# EAGLE board Cansat-2025-1 (EAGLE 9.4.2)
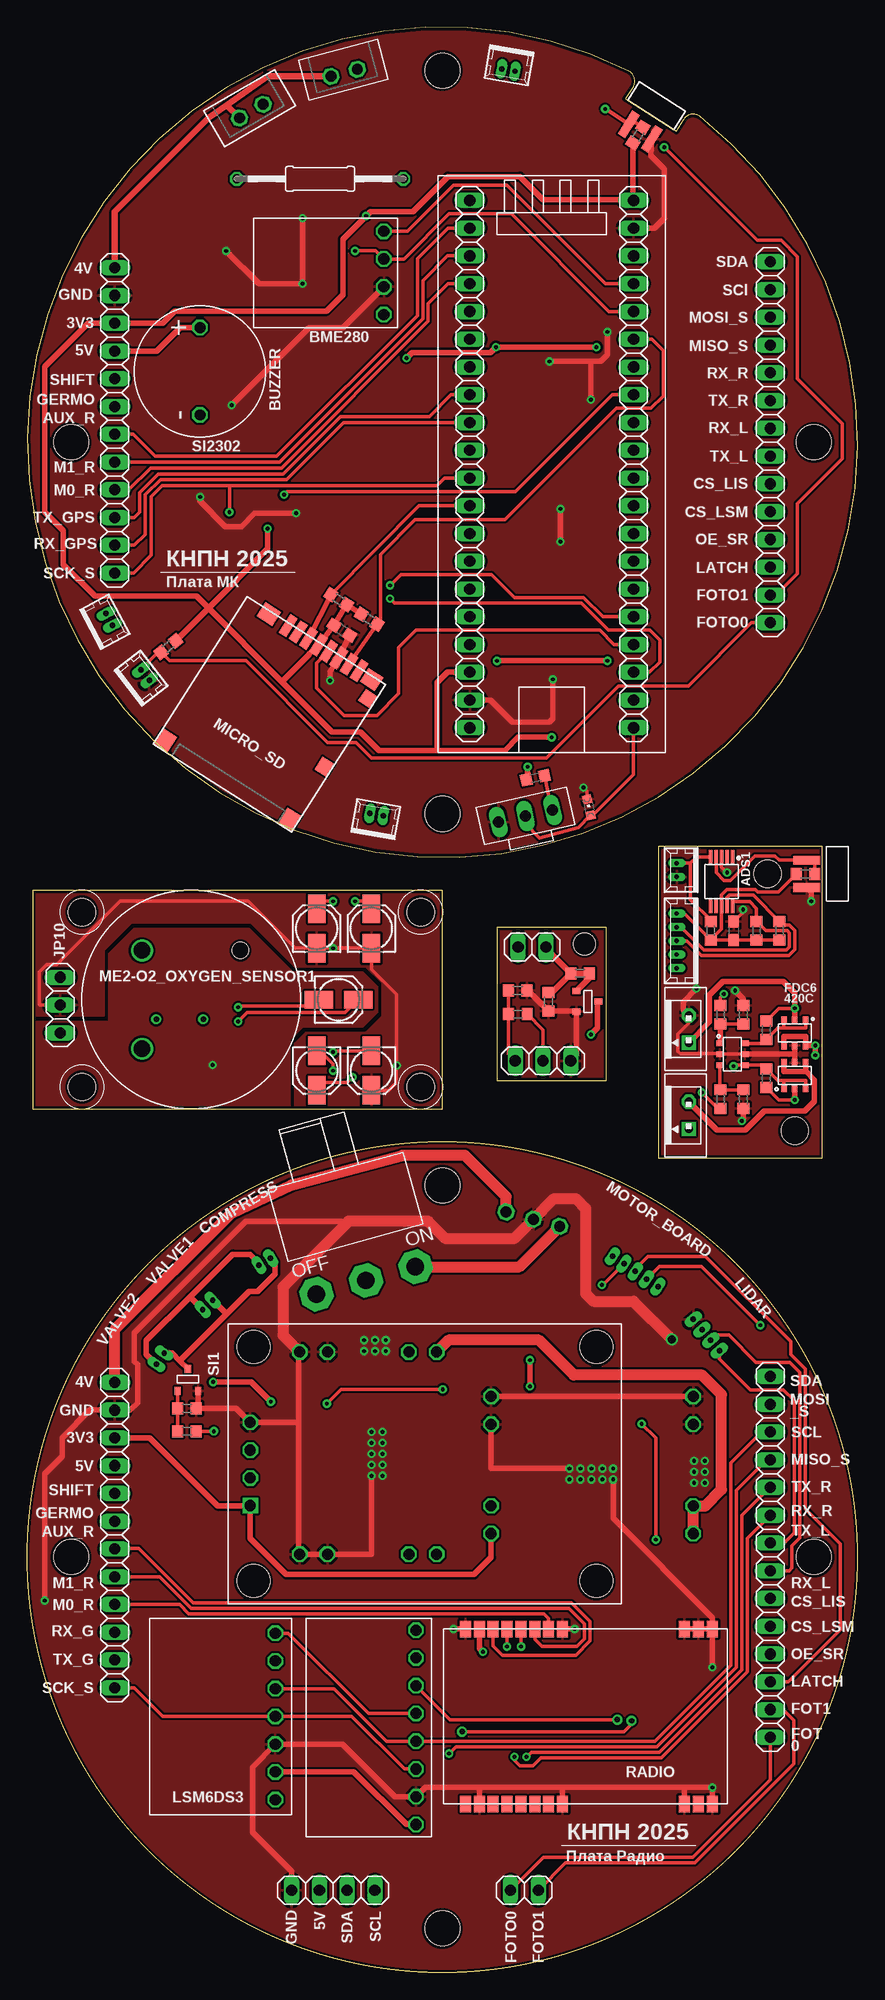
[diagram p0: board, top side]
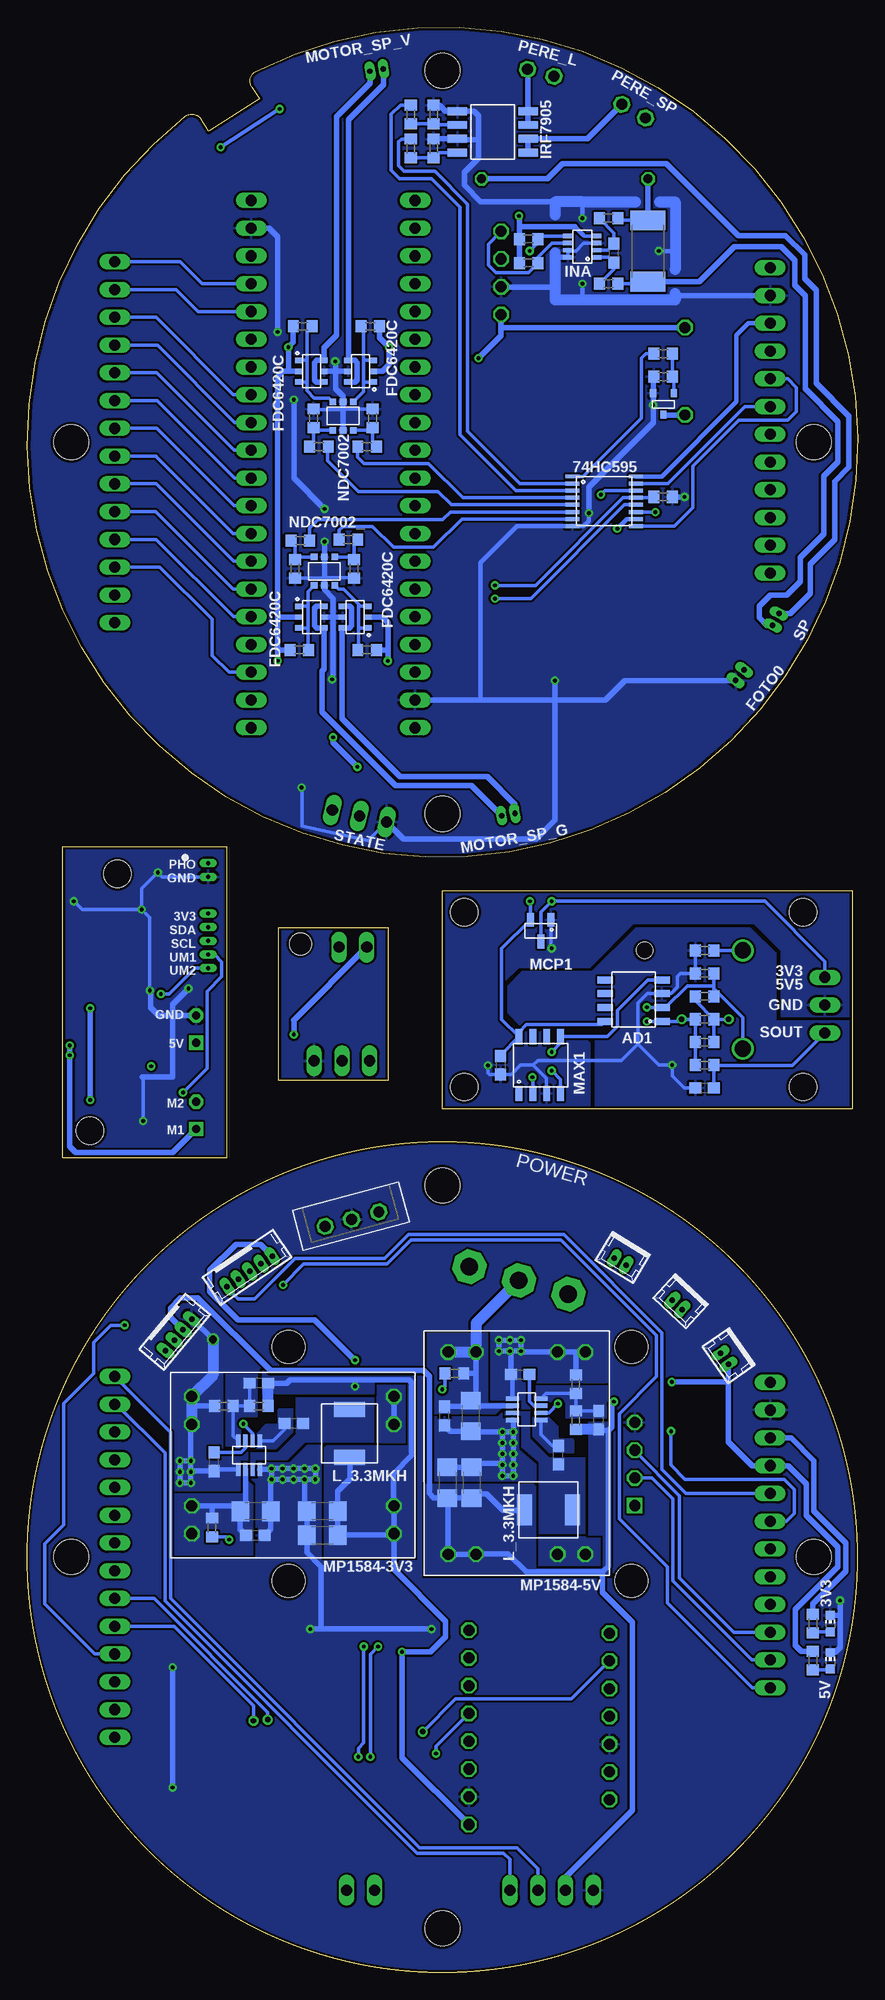
[diagram p1: board, bottom side, seen from below]

Size 76 x 177.97 mm. Coordinates in mm from the lower left corner, seen from the top.
Outline: 43,81.6 53,81.6 53,95.6 43,95.6 43,81.6
Outline: 57.75,74.5 72.75,74.5 72.75,103 57.75,103 57.75,74.5
Outline: 55.46,172.52 54.76,171.42 59.39,168.46 60.1,169.57 arc-96 61.56,169.81 arc-348 55.06,173.95 arc-96 55.46,172.52
Outline: 0.5,79 38,79 38,99 0.5,99 0.5,79
Outline: circle at 38,38 radius 38
Copper layers (1*16): Top 0.035mm / dielectric 1mm / Bottom 0.035mm
Design rules "default *": minimum track width 0.2mm, minimum drill 0.35mm, track to track 0.2mm, track to pad 0.2mm, pad to pad 0.2mm, via to via 0.2mm, smd to smd 6mil, copper to edge 10mil, drill to drill 6mil, minimum pad ring 0.2mm, minimum via ring 0.2mm, stop-mask expansion 4mil, vias tented up to drill 0mil, thermal gap 10mil
Holes 3.2 mm at 38,72 72,38 38,4 4,38 4,140 38,106 72,140 38,174
Holes 2 mm at 51,94.1
Holes 2.5 mm at 67.75,100.5 70.25,77 5,97 5,81 36,97 36,81

## Footprints (pad centres in the part's own frame; a part is rotated, then mirrored left to right if it is on the bottom)
CHIP-LED0603 = smd 0.8 x 0.8: A 0,-0.75; C 0,0.75
TSSOP16 = smd 1.26 x 0.36: 1 -2.9,2.275; 2 -2.9,1.625; 3 -2.9,0.975; 4 -2.9,0.325; 5 -2.9,-0.325; 6 -2.9,-0.975; 7 -2.9,-1.625; 8 -2.9,-2.275; 9 2.9,-2.275; 10 2.9,-1.625; 11 2.9,-0.975; 12 2.9,-0.325; 13 2.9,0.325; 14 2.9,0.975; 15 2.9,1.625; 16 2.9,2.275
AD8572 = smd 1.4 x 0.635: P1 -2.6,2; P2 -2.6,0.73; P3 -2.6,-0.54; P4 -2.6,-1.81; P5 2.6,-1.81; P6 2.6,-0.54; P7 2.6,0.73; P8 2.6,2
MSOP10 = smd 0.3 x 1.275: 1 -1,-2.24; 2 -0.5,-2.24; 3 0,-2.24; 4 0.5,-2.24; 5 1,-2.24; 6 1,2.24; 7 0.5,2.24; 8 0,2.24; 9 -0.5,2.24; 10 -1,2.24
BME280-PINS-ONLY = drill 1.016 octagon: P$1 -3.81,5.33; P$2 -1.27,5.33; P$3 1.27,5.33; P$4 3.81,5.33
BUZZER-S8R12 = drill 1 octagon: P$1 -4,0; P$2 4,0
C0603 = smd 1.1 x 1: 1 -0.85,0; 2 0.85,0
C1206 = smd 1.6 x 1.8: 1 -1.4,0; 2 1.4,0
153CLV-0405 = smd 2.6 x 1.6: + 1.8,0; - -1.8,0
53047-02 = drill 0.5 pad 0.698 long: 1 0.625,0.45; 2 -0.625,0.45
GPS-NEO7M = drill 1.016 square: P$1 -3.81,16 | drill 1.016 octagon: P$2 -1.27,16; P$3 1.27,16; P$4 3.81,16 | hole 3: -10.7,15.7; 10.7,15.7; 10.7,-15.7; -10.7,-15.7
SOT23-8 = smd 0.9 x 0.4: 1 -1.3,0.975; 2 -1.3,0.325; 3 -1.3,-0.325; 4 -1.3,-0.975; 5 1.3,-0.975; 6 1.3,-0.325; 7 1.3,0.325; 8 1.3,0.975
SO8 = smd 0.72 x 1.78: 1 -1.905,-3.23; 2 -0.635,-3.23; 3 0.635,-3.23; 4 1.905,-3.23; 5 1.905,3.23; 6 0.635,3.23; 7 -0.635,3.23; 8 -1.905,3.23
1X14 = drill 1.016 long: 1 -16.51,0; 2 -13.97,0; 3 -11.43,0; 4 -8.89,0; 5 -6.35,0; 6 -3.81,0; 7 -1.27,0; 8 1.27,0; 9 3.81,0; 10 6.35,0; 11 8.89,0; 12 11.43,0; 13 13.97,0; 14 16.51,0
1X02 = drill 1.016 long: 1 -1.27,0; 2 1.27,0
1X12 = drill 1.016 long: 1 -13.97,0; 2 -11.43,0; 3 -8.89,0; 4 -6.35,0; 5 -3.81,0; 6 -1.27,0; 7 1.27,0; 8 3.81,0; 9 6.35,0; 10 8.89,0; 11 11.43,0; 12 13.97,0
1X04 = drill 1.016 long: 1 -3.81,0; 2 -1.27,0; 3 1.27,0; 4 3.81,0
1X03 = drill 1.016 long: 1 -2.54,0; 2 0,0; 3 2.54,0
L_SPM5020 = smd 1.4 x 2.8: P$1 -2.2,0; P$2 2.2,0
53047-04 = drill 0.5 pad 0.698 long: 1 1.875,0.45; 2 0.625,0.45; 3 -0.625,0.45; 4 -1.875,0.45
LSM6DS3_WITHOUT = drill 1.016 octagon: P$1 -7.62,-5; P$2 -5.08,-5; P$3 -2.54,-5; P$4 0,-5; P$5 2.54,-5; P$6 5.08,-5; P$7 7.62,-5
MAX660 = smd 1.4 x 0.635: P1 -2.6,2; P2 -2.6,0.73; P3 -2.6,-0.54; P4 -2.6,-1.81; P5 2.6,-1.81; P6 2.6,-0.54; P7 2.6,0.73; P8 2.6,2
MCP1700 = smd 0.635 x 1.27: P1 -0.95,-1; P2 0.95,-1; P3 0,1
ME2-O2_OXYGEN_SENSOR = drill 1.5 pad 2: C -6.364,0; D 0,6.364 | hole 1.5: 6.364,0
SD = smd 0.8 x 2: CLK 6,-15.77; CMD 8.2,-15.77; DAT0 3.8,-15.77; DAT1 2.7,-15.77; DAT2 10.4,-15.77; DAT3 9.3,-15.77; VDD 7.1,-15.77; VSS 4.9,-15.77 | smd 1.5 x 1.7: P$9 0.75,-0.85; P$13 14.25,-0.85 | smd 1.6 x 1.5: P$10 1.3,-15.7 | smd 1.29 x 1.3: P$11 0.645,-14.05 | smd 1.29 x 1.4: P$12 0.645,-6.65 | smd 1.7 x 1.5: P$14 12.45,-15.7
53047-05 = drill 0.5 pad 0.698 long: 1 2.5,0.45; 2 1.25,0.45; 3 0,0.45; 4 -1.25,0.45; 5 -2.5,0.45
MP1584-B = drill 1.016 octagon: P$1 -9.25,-6.27; P$2 -9.25,-3.73; P$3 -9.25,3.73; P$4 -9.25,6.27; P$5 9.25,6.27; P$6 9.25,3.73; P$7 9.25,-3.73; P$8 9.25,-6.27
SOT23-6 = smd 0.6 x 0.6: 1 -0.95,-1.3; 2 0,-1.3; 3 0.95,-1.3; 4 0.95,1.3; 5 0,1.3; 6 -0.95,1.3
JST-2-2.5 = drill 1 pad 1.5 octagon: 1 1.25,0; 2 -1.25,0
SS_12D11 = drill 1.6 pad 3 octagon: 1 -4.7,0; 2 0,0; 3 4.7,0
R0603 = smd 1 x 1.1: 1 -0.85,0; 2 0.85,0
R2512 = smd 1.8 x 3.2: 1 -2.8,0; 2 2.8,0
0207/15 = drill 0.813 octagon: 1 -7.62,0; 2 7.62,0
E220-400T22S = smd 1.5 x 1: P$1 -8,11; P$2 -8,9.73; P$3 -8,8.46; P$4 -8,7.19; P$5 -8,5.92; P$6 -8,4.65; P$7 -8,3.38; P$8 -8,2.11; P$11 -8,-9.06; P$12 -8,-10.33; P$13 -8,-11.6; P$14 8,-11.6; P$15 8,-10.33; P$16 8,-9.06; P$19 8,2.11; P$20 8,3.38; P$21 8,4.65; P$22 8,5.92; P$23 8,7.19; P$24 8,8.46; P$25 8,9.73; P$26 8,11
SOT23-3 = smd 0.56 x 0.73: 1 -0.95,-1; 2 0.95,-1; 3 0,1
CHIPLED_0603 = smd 0.8 x 0.8: A 0,-0.75; C 0,0.75
STM32F411_BOARD = drill 1.016 long: 1 24.13,7.5; 2 21.59,7.5; 3 19.05,7.5; 4 16.51,7.5; 5 13.97,7.5; 6 11.43,7.5; 7 8.89,7.5; 8 6.35,7.5; 9 3.81,7.5; 10 1.27,7.5; 11 -1.27,7.5; 12 -3.81,7.5; 13 -6.35,7.5; 14 -8.89,7.5; 15 -11.43,7.5; 16 -13.97,7.5; 17 -16.51,7.5; 18 -19.05,7.5; 19 -21.59,7.5; 20 -24.13,7.5; 21 -24.13,-7.5; 22 -21.59,-7.5; 23 -19.05,-7.5; 24 -16.51,-7.5; 25 -13.97,-7.5; 26 -11.43,-7.5; 27 -8.89,-7.5; 28 -6.35,-7.5; 29 -3.81,-7.5; 30 -1.27,-7.5; 31 1.27,-7.5; 32 3.81,-7.5; 33 6.35,-7.5; 34 8.89,-7.5; 35 11.43,-7.5; 36 13.97,-7.5; 37 16.51,-7.5; 38 19.05,-7.5; 39 21.59,-7.5; 40 24.13,-7.5
VT93N1 = smd 0.8 x 2.5: P$1 -1.25,-1.8; P$2 1.25,-1.8
SWITCH_MSS = drill 1.016 long: 1 -2.54,0; 2 0,0; 3 2.54,0
TSOT23-8 = smd 0.4 x 1.2: P$1 -0.975,-1.3; P$2 -0.325,-1.3; P$3 0.325,-1.3; P$4 0.975,-1.3; P$5 0.975,1.3; P$6 0.325,1.3; P$7 -0.325,1.3; P$8 -0.975,1.3
LIS3MDL = drill 1.016 octagon: CS -5.08,-3.81; DRDY -5.08,-8.89; GND -5.08,6.35; INT -5.08,-6.35; SCL -5.08,3.81; SDA -5.08,1.27; SDO -5.08,-1.27; UCC -5.08,8.89
TSOP-6 = smd 0.5 x 0.7: P$1 -1,-1.15; P$2 0,-1.15; P$3 1,-1.15; P$4 1,1.15; P$5 0,1.15; P$6 -1,1.15
JST-3-2.5 = drill 1 pad 1.5 octagon: 1 2.52,0; 2 0.02,0; 3 -2.56,0
MOLEX-5-1.25 = drill 0.4 long: P$1 0,2.5; P$2 0,1.25; P$3 0,0; P$4 0,-1.25; P$5 0,-2.5
MOLEX-2-1.25 = drill 0.4 long: P$1 0,0.625; P$2 0,-0.625
B2B-PH-K-S = drill 0.75 pad 1.3 square: 1 1.25,0 | drill 0.75 pad 1.3 octagon: 2 -1.25,0

## Placement (x,y rotation side)
3V3  [CHIP-LED0603]  2.5,31.9 0 bottom
5V  [CHIP-LED0603]  2.5,28.5 0 bottom
74HC595  74HC595  [TSSOP16]  23.2,134.6 0 bottom
AD1  AD8572  [AD8572]  20.5,89 180 bottom
ADS1  ADS1115  [MSOP10]  63.55,99.8 180 top
BME280  BME280BME280-PINS-ONLY  [BME280-PINS-ONLY]  27.3,155.5 270 top
BUZZER  BUZZERS8R6  [BUZZER-S8R12]  15.8,146.5 90 top
C1  0.1uF  [C0603]  14,80.9 180 bottom
C2  100nF  [C0603]  28.8,122.8 147.5 top
C3  0,1u  [C0603]  58.9,46.7 90 bottom
C4  0,1u  [C1206]  35.4,50.9 90 bottom
C5  100nF  [C0603]  22.3,157.3 90 bottom
C6  22u  [C0603]  37.8,50.9 90 bottom
C7  0,1u  [C0603]  51.6,50.2 180 bottom
C8  33p  [C0603]  54.8,53.9 180 bottom
C9  22u  [C1206]  49,42.2 0 bottom
C10  22u  [C1206]  49,40 0 bottom
C11  0,1u  [C0603]  30.9,54.7 0 bottom
C12  0,1u  [C1206]  55.12,42.16 180 bottom
C13  22u  [C0603]  55.11,39.96 180 bottom
C14  0,1u  [C0603]  27.4,47.3 90 bottom
C15  33p  [C0603]  23.7,50.5 90 bottom
C16  22u  [C1206]  37.55,44.8 270 bottom
C17  22u  [C1206]  35.35,44.8 270 bottom
C25  0.1uF  [C0603]  64.65,95.3 270 top
C26  10uF  [153CLV-0405]  28.5,89 0 top
C27  10uF  [153CLV-0405]  31.5,82.5 270 top
C28  10uF  [153CLV-0405]  26.5,82.5 270 top
C29  0.1uF  [C0603]  32.7,83 270 bottom
C30  1uF  [153CLV-0405]  26.5,95.5 90 top
C31  1uF  [153CLV-0405]  31.5,95.5 90 top
COMPRESS  MOLEX-2-1.25  [53047-02]  21.5,65.4 149 bottom
FOTO0  MOLEX-2-1.25  [53047-02]  10.42,118.42 308 top
GPS-NEO7M  GPS-NEO7M  [GPS-NEO7M]  36.4,46.5 90 top
INA  INA219AID  [SOT23-8]  25.2,157.9 180 bottom
IRF7905  IRF7905PBF  [SO8]  33.4,168.4 270 bottom
JP1  [1X14]  68,38 270 top
JP2  [1X02]  45.5,7.5 180 top
JP3  [1X14]  68,140 270 top
JP4  [1X12]  8,142 270 top
JP5  [1X12]  8,40 270 top
JP6  [1X04]  28,7.5 0 top
JP8  [1X03]  47.2,83.4 0 top
JP9  [1X02]  46.2,93.8 180 top
JP10  [1X03]  3,88.5 90 top
L_3.3  L_3.3MKH  [L_SPM5020]  46.5,49.3 90 bottom
LIDAR  MOLEX-4-1.25  [53047-04]  62.5,58.6 230 bottom
LSM6DS3  LSM6DS3  [LSM6DS3_WITHOUT]  17.7,23.4 90 top
MAX1  MAX660  [MAX660]  29,83 90 bottom
MCP1  MCP1700  [MCP1700]  29,95.3 180 bottom
ME2-O2_OXYGEN_SENSOR1  ME2-O2_OXYGEN_SENSOR  [ME2-O2_OXYGEN_SENSOR]  15,89 45 top
MICRO_SD  SD  [SD]  24.18,104.34 147.5 top
MOTOR_BOARD  MOLEX-5-1.25  [53047-05]  55.9,64.5 214 bottom
MOTOR_SP_G  MOLEX-2-1.25  [53047-02]  31.9,105.5 350 top
MOTOR_SP_V  MOLEX-2-1.25  [53047-02]  44.1,174.5 170 top
MP1584-3V3  MP1584-B  [MP1584-B]  51.7,46.4 0 bottom
MP1584-5V  MP1584  [MP1584-B]  31.2,47.5 270 bottom
NDC7002  NDC7002N  [SOT23-6]  47.1,142.4 0 bottom
NDC7002_  NDC7002N  [SOT23-6]  48.8,128.2 180 bottom
PERE_L  JST-2-2.5  [JST-2-2.5]  29,173.8 195 top
PERE_SP  JST-2-2.5  [JST-2-2.5]  20.5,170.3 210 top
POWER  [SS_12D11]  31,63.3 15.5 top
R0  2k2  [R0603]  55.9,168.1 57.5 top
R1  5K  [R0603]  14,87.2 0 bottom
R3  68K  [R0603]  14,89.3 180 bottom
R4  10K  [R0603]  14,91.4 0 bottom
R5  10K  [R0603]  14,83 180 bottom
R6  47R  [R0603]  14,93.5 0 bottom
R11  10k  [R0603]  17.8,146 180 bottom
R12  100R  [R0603]  17.8,148.1 0 bottom
R13  2k  [R0603]  46.5,109.3 192.5 top
R14  5k1  [R0603]  30.1,156.4 180 bottom
R15  5k1  [R0603]  30.1,158.6 180 bottom
R16  10k  [R0603]  31.3,123.8 327.5 top
R17  10k  [R0603]  28.5,125.6 147.5 top
R18  2k2  [R0603]  12.9,121.3 218 top
R19  10R  [R0603]  22.8,154.5 180 bottom
R20  10R  [R0603]  22.8,160.5 180 bottom
R21  R05  [R2512]  19.2,157.5 270 bottom
R22  10k  [R0603]  38.8,170 90 bottom
R23  100R  [R0603]  40.9,170 270 bottom
R24  10k  [R0603]  38.8,166.9 90 bottom
R25  100R  [R0603]  40.9,166.9 270 bottom
R26  10k  [R0603]  44.9,121 180 bottom
R27  10k  [R0603]  51.1,121 0 bottom
R28  10k  [R0603]  46.1,128.4 90 bottom
R29  10k  [R0603]  51.5,128.4 90 bottom
R30  100R  [R0603]  46.6,131.1 0 bottom
R31  100R  [R0603]  51,131 180 bottom
R32  10k  [R0603]  50.8,150.6 0 bottom
R33  10k  [R0603]  44.6,150.6 180 bottom
R34  10k  [R0603]  49.8,142.2 270 bottom
R35  10k  [R0603]  44.4,142.2 270 bottom
R36  100R  [R0603]  49.3,139.6 180 bottom
R37  100R  [R0603]  44.9,139.6 0 bottom
R38  5k1  [R0603]  17.8,135 180 bottom
R39  100R  [0207/15]  26.8,164.1 0 top
R40  100k  [R0603]  59.1,40.7 270 bottom
R41  10k  [R0603]  58,51.8 180 bottom
R42  31k6  [R0603]  54.8,51.8 0 bottom
R43  100k  [R0603]  36.9,54.8 180 bottom
R44  10k  [R0603]  25.8,53.8 90 bottom
R45  53k6  [R0603]  25.8,50.5 270 bottom
R46  2k  [R0603]  4.1,28.5 90 bottom
R47  2k  [R0603]  4.1,31.9 90 bottom
R48  10k  [R0603]  14.6,51.6 0 top
R49  100R  [R0603]  14.6,49.5 180 top
R55  5.1K  [R0603]  44.91,87.66 180 top
R56  10K  [R0603]  44.89,89.82 0 top
R57  10K  [R0603]  47.7,88.8 90 top
R58  100R  [R0603]  50.6,91.4 180 top
R59  10K  [R0603]  67.65,86.2 90 top
R60  10K  [R0603]  67.65,81.8 90 top
R61  2k  [R0603]  71.25,100.5 0 top
R62  2k  [R0603]  62.55,95.3 90 top
R63  5K1  [R0603]  68.85,95.3 270 top
R64  5K1  [R0603]  66.75,95.3 270 top
R65  100R  [R0603]  63.45,87.6 90 top
R66  10K  [R0603]  65.55,87.6 270 top
R67  100R  [R0603]  63.45,79.9 90 top
R68  10K  [R0603]  65.55,79.9 90 top
RADIO  E220-400T22S  [E220-400T22S]  51.1,23.4 90 top
RT2  5K  [R0603]  14,85.1 0 bottom
SI1  SI2302CDS  [SOT23-3]  14.7,54.2 0 top
SI2300A  SI2302CDS  [SOT23-3]  51.27,88.84 270 top
SI2302  SI2302CDS  [SOT23-3]  17.76,143.51 180 bottom
SP  MOLEX-2-1.25  [53047-02]  7.1,123.57 298 top
STATE  [CHIPLED_0603]  51.4,106.6 12.5 top
STM32F411  STM32F411_BOARD  [STM32F411_BOARD]  48,138 90 top
U$0  VT93N1  [VT93N1]  57.07,169.94 327.5 top
U$1  SWITCH_MSS  [SWITCH_MSS]  45.6,105.8 192.5 top
U$4  Плата МК  [LOGO]  12.2,128.1 0 top
U$5  Плата Радио  [LOGO]  48.9,11.6 0 top
U$6  MP2225  [TSOT23-8]  55.7,47.3 0 bottom
U$7  MP2225  [TSOT23-8]  30.3,51.5 270 bottom
U$8  L_3.3MKH  [L_SPM5020]  28.3,42.3 0 bottom
U$9  VT93N1  [VT93N1]  73.15,100.5 270 top
U$10  LIS3MDL  [LIS3MDL]  30.5,22.4 180 top
U$11  IRF5852  [TSOP-6]  64.55,84 270 top
U$12  FDC6420C  [TSOP-6]  70.25,82.05 0 top
U$13  FDC6420C  [TSOP-6]  70.25,85.95 180 top
U$19  FDC6420C  [TSOP-6]  46,124 90 bottom
U$20  FDC6420C  [TSOP-6]  50,124 270 bottom
U$21  FDC6420C  [TSOP-6]  50,146.5 270 bottom
U$22  FDC6420C  [TSOP-6]  45.5,146.5 90 bottom
VALVE1  MOLEX-2-1.25  [53047-02]  16.2,61.4 137 bottom
VALVE2  MOLEX-2-1.25  [53047-02]  11.8,56.4 125 bottom
X5  AKKUM  [JST-3-2.5]  46.3,68.9 195 bottom
X6  JST-5  [MOLEX-5-1.25]  59.45,94.38 0 top
X7  JST-2-1.25  [MOLEX-2-1.25]  59.45,100.85 0 top
X8  JST-2-K-S  [B2B-PH-K-S]  60.55,86.3 270 top
X9  JST-2-K-S  [B2B-PH-K-S]  60.55,78.4 270 top

## Library data of the parts
3V3 5V STATE = led
74HC595 BUZZER INA L_3.3 SI1 SI2300A SI2302 U$8 = CanCubeSat
AD1 MAX1 MCP1 ME2-O2_OXYGEN_SENSOR1 = grib
ADS1 U$11 X6-X9 = NA-2025
BME280 COMPRESS FOTO0 GPS-NEO7M IRF7905 LIDAR LSM6DS3 MICRO_SD MOTOR_BOARD MOTOR_SP_G MOTOR_SP_V MP1584-3V3 MP1584-5V NDC7002 NDC7002_ PERE_L PERE_SP POWER RADIO SP STM32F411 U$1 U$4-U$7 U$10 VALVE1 VALVE2 X5 = UNKNOWN-2024
C1-C17 C25-C31 = rcl; SPICEPREFIX: C
JP1-JP6 JP8-JP10 = pinhead
R0 R1 R3-R6 R11-R49 R55-R68 RT2 = rcl; SPICEPREFIX: R
U$0 U$9 U$12 U$13 U$19-U$22 = KNPN-2023

## Nets
3.3-5.5V1: C30.+ JP10.3 MCP1.P3
3V1: 74HC595.10 74HC595.16 C2.2 INA.4 JP4.3 MICRO_SD.VDD R0.1 R13.2 R14.2 R15.2 R16.1 R17.1 R18.1 STM32F411.18 STM32F411.40
3V2: C8.1 C9.2 C10.2 GPS-NEO7M.P$1 JP5.3 L_3.3.P$1 LSM6DS3.P$2 MOTOR_BOARD.5 MP1584-3V3.P$7 MP1584-3V3.P$8 R42.2 R47.2 RADIO.P$25 U$10.UCC
3V3: AD1.P8 C29.1 C31.+ MAX1.P8 MCP1.P2
3V4: ADS1.8 C25.2 R61.1 R62.1 R63.2 R64.2 X6.P$1
4V: JP4.1 PERE_L.1 PERE_SP.1
4V1: JP5.1 X5.3
5V1: BME280.P$4 BUZZER.P$2 JP4.4 R26.1 R27.1 R32.1 R33.1 U$19.P$2 U$20.P$2 U$21.P$2 U$22.P$2
5V2: C15.1 C16.2 C17.2 COMPRESS.2 JP5.4 JP6.2 LIDAR.3 MP1584-5V.P$7 MP1584-5V.P$8 R45.2 R46.2 U$8.P$1 VALVE1.2 VALVE2.2
5V3: R59.2 R60.1 U$12.P$2 U$13.P$2 X8.1
-3V1: AD1.P4 C27.- MAX1.P5
AUX_RADIO: JP4.7 STM32F411.2
AUX_RADIO1: JP5.7 RADIO.P$24
BUS+: C4.2 C6.2 C12.2 C13.2 MP1584-3V3.P$1 MP1584-3V3.P$2 MP1584-5V.P$1 MP1584-5V.P$2 POWER.2 R40.1 R43.1 U$6.P$2 U$7.P$2
BUS+_OUT: POWER.3 X5.1
BUZZER: 74HC595.1 R12.1
C1: AD1.P2 C26.- ME2-O2_OXYGEN_SENSOR1.C R3.1 R4.2
CK_SD: MICRO_SD.CLK STM32F411.24
CMD_SD: MICRO_SD.CMD R17.2 STM32F411.12
CS_LIS: JP3.9 STM32F411.27
CS_LIS1: JP1.9 U$10.CS
CS_LSM: JP3.10 STM32F411.26
CS_LSM1: JP1.10 LSM6DS3.P$6
D0_SD: MICRO_SD.DAT0 R16.2 STM32F411.35
D1: JP9.2 SI2300A.3
D2: ME2-O2_OXYGEN_SENSOR1.D R6.2
FOTO0: FOTO0.2 JP3.14 R18.2
FOTO1: JP3.13 R0.2 U$0.P$1
FOTO2: JP1.13 JP2.1
FOTO3: JP1.14 JP2.2
G: JP9.1 R57.2 R58.1 R58.2 SI2300A.1
GERMO: 74HC595.15 JP4.6
GERMO1: JP5.6 R49.1
GND: AD1.P3 C1.2 C27.+ C29.2 C30.- C31.- JP10.2 MAX1.P3 MCP1.P1 R4.1 R6.1
GND1: 74HC595.8 BME280.P$3 C2.1 FOTO0.1 INA.3 INA.7 INA.8 IRF7905.1 IRF7905.3 JP4.2 MICRO_SD.VSS NDC7002.2 NDC7002.5 NDC7002_.2 NDC7002_.5 R11.2 R22.2 R24.2 R28.1 R29.1 R34.1 R35.1 R38.1 SI2302.2 STATE.C STM32F411.19 STM32F411.39 U$0.P$2 U$1.3 U$19.P$5 U$20.P$5 U$21.P$5 U$22.P$5
GND2: 3V3.C 5V.C C3.1 C4.1 C6.1 C9.1 C10.1 C11.1 C12.1 C13.1 C16.1 C17.1 GPS-NEO7M.P$4 JP5.2 JP6.1 LIDAR.4 LSM6DS3.P$3 MP1584-3V3.P$3 MP1584-3V3.P$4 MP1584-3V3.P$5 MP1584-3V3.P$6 MP1584-5V.P$3 MP1584-5V.P$4 MP1584-5V.P$5 MP1584-5V.P$6 R41.2 R44.2 R48.2 RADIO.P$2 RADIO.P$8 RADIO.P$11 RADIO.P$13 RADIO.P$14 RADIO.P$15 RADIO.P$16 RADIO.P$19 RADIO.P$26 SI1.2 U$6.P$1 U$6.P$4 U$7.P$1 U$7.P$4 U$10.GND X5.2
GND4: JP8.3 R56.2 R57.1 SI2300A.2
GND5: ADS1.3 C25.1 R66.1 R68.1 U$9.P$2 U$11.P$2 U$11.P$5 U$12.P$5 U$13.P$5 X7.P$2 X8.2
IN: JP8.2 R55.1
INA_SP+: R20.1 R21.1 R39.1
LATCH_SR: 74HC595.12 JP3.12 STM32F411.23
LATCH_SR1: JP1.12 MOTOR_BOARD.3
M0_RADIO: JP4.9 STM32F411.4
M0_RADIO1: JP5.9 RADIO.P$20
M1_RADIO: JP4.8 STM32F411.3
M1_RADIO1: JP5.8 RADIO.P$21
M3: U$12.P$4 U$12.P$6 X9.2
M4: U$13.P$4 U$13.P$6 X9.1
MISO_SENS: JP3.4 STM32F411.32
MISO_SENS1: JP1.4 LSM6DS3.P$7 U$10.SDO
MK_MOTOR1+: 74HC595.4 R37.1
MK_MOTOR1-: 74HC595.5 R36.1
MK_MOTOR2+: 74HC595.6 R31.1
MK_MOTOR2-: 74HC595.7 R30.1
MOSI_SENS: 74HC595.14 JP3.3 STM32F411.33
MOSI_SENS1: JP1.3 LSM6DS3.P$5 U$10.SDA
MOTOR1+: MOTOR_SP_V.1 U$22.P$4 U$22.P$6
MOTOR1-: MOTOR_SP_V.2 U$21.P$4 U$21.P$6
MOTOR2+: MOTOR_SP_G.1 U$20.P$4 U$20.P$6
MOTOR2-: MOTOR_SP_G.2 U$19.P$4 U$19.P$6
N$1: AD1.P1 C26.+ R1.1 R5.2 RT2.1
N$2: R13.1 U$1.1
N$3: C8.2 R41.1 R42.1 U$6.P$8
N$4: R1.2 R3.2 RT2.2
N$5: C28.+ MAX1.P2
N$6: C11.2 U$7.P$7
N$7: R43.2 U$7.P$6
N$8: C15.2 R44.1 R45.1 U$7.P$8
N$9: C3.2 U$6.P$7
N$10: R40.2 U$6.P$6
N$11: C7.2 U$6.P$5
N$12: C7.1 L_3.3.P$2 U$6.P$3
N$13: BUZZER.P$1 SI2302.3
N$14: R11.1 R12.2 SI2302.1
N$15: C5.2 INA.2 R20.2
N$16: C14.2 U$7.P$5
N$17: C14.1 U$7.P$3 U$8.P$2
N$18: C5.1 INA.1 R19.2
N$19: 5V.A R46.1
N$20: IRF7905.7 IRF7905.8 PERE_L.2
N$21: IRF7905.5 IRF7905.6 PERE_SP.2
N$22: IRF7905.2 R22.1 R23.2
N$23: IRF7905.4 R24.1 R25.2
N$24: NDC7002.6 R32.2 U$21.P$1 U$21.P$3
N$25: NDC7002_.6 R26.2 U$19.P$1 U$19.P$3
N$26: NDC7002_.4 R27.2 U$20.P$1 U$20.P$3
N$27: NDC7002.4 R33.2 U$22.P$1 U$22.P$3
N$28: NDC7002.1 R34.2 R36.2
N$29: NDC7002.3 R35.2 R37.2
N$30: 3V3.A R47.1
N$31: R48.1 R49.2 SI1.1
N$32: NDC7002_.1 R28.2 R30.2
N$33: COMPRESS.1 SI1.3 VALVE1.1 VALVE2.1
N$35: NDC7002_.3 R29.2 R31.2
N$39: ADS1.4 R61.2 U$9.P$1
N$40: R65.1 R66.2 U$11.P$1
N$41: R67.2 R68.2 U$11.P$3
N$42: C28.- MAX1.P4
OE_SR: 74HC595.13 JP3.11 R38.2 STM32F411.25
OE_SR1: JP1.11 MOTOR_BOARD.2
OUT: JP8.1 R55.2 R56.1
PERE1: 74HC595.3 R23.1
PERE2: 74HC595.2 R25.1
PHOTO1: ADS1.5 R62.2 X7.P$1
RX_GPS: JP4.11 STM32F411.9
RX_GPS1: GPS-NEO7M.P$3 JP5.10
RX_LIDAR: JP3.7 STM32F411.29
RX_LIDAR1: JP1.8 LIDAR.2
RX_RADIO: JP3.5 STM32F411.31
RX_RADIO1: JP1.6 RADIO.P$23
SCK_SENS: 74HC595.11 JP4.12 STM32F411.11
SCK_SENS1: JP5.12 LSM6DS3.P$4 MOTOR_BOARD.4 U$10.SCL
SCL1: BME280.P$2 INA.5 JP3.2 R15.1 STM32F411.36
SCL2: JP1.2 JP6.4
SCL3: ADS1.9 R63.1 X6.P$3
SDA1: BME280.P$1 INA.6 JP3.1 R14.1 STM32F411.37
SDA2: JP1.1 JP6.3
SDA3: ADS1.10 R64.1 X6.P$2
SHIFT: 74HC595.9 JP4.5
SHIFT1: JP5.5 MOTOR_BOARD.1
SOUT1: C1.1 JP10.1 R5.1
SP+: R19.1 R21.2 SP.1
SP-: R39.2 SP.2
SWITCH: STATE.A STM32F411.21 U$1.2
TX_GPS: JP4.10 STM32F411.8
TX_GPS1: GPS-NEO7M.P$2 JP5.11
TX_LIDAR: JP3.8 STM32F411.28
TX_LIDAR1: JP1.7 LIDAR.1
TX_RADIO: JP3.6 STM32F411.30
TX_RADIO1: JP1.5 RADIO.P$22
UM1_MOSFET1: R59.1 U$11.P$6 U$13.P$1 U$13.P$3
UM2_MOSFET1: R60.2 U$11.P$4 U$12.P$1 U$12.P$3
UM3: R67.1 X6.P$4
UM4: R65.2 X6.P$5

## Tracks (layer width: path | path; a pad name or v marks a point on that pad's centre or on a via)
3.3-5.5V1  (via drill 0.35)
  Top 0.3: C30.+ 27.2,98 v28,98
  Bottom 0.3: JP10.3 3,92.5 8.5,98 v28,98 29,97 MCP1.P3
3V1  (via drill 0.35)
  Top 0.5: R0.1 55.44,162.19 | 55.44,162.19 STM32F411.40 | 55.44,162.19 47.21,162.19 45.1,164.3 38.5,164.3 35.3,161.1 31.4,161.1 v31,160.7 28.88,158.58 28.88,153.48 27.4,152 13.5,152 12.39,150.89 JP4.3 5.59,150.89 1.6,146.9 1.6,133.6 3.3,131.9 3.3,128.8 6.2,125.9 15.5,125.9 16.45,124.95 | v48,113 44.9,113 43.7,111.8 37.5,111.8 | v45.8,110.3 45.8,109.25 R13.2 | R16.1 R17.1 C2.2 MICRO_SD.VDD 25.84,120.64 25.81,120.59 25.79,120.59 23.4,118.2 23.2,118.2 | 37.5,111.8 32.2,111.8 30.5,113.5 27.9,113.5 23.2,118.2 | STM32F411.18 38.45,118.95 37.5,118 37.5,111.8 | 23.2,118.2 16.45,124.95 | R18.1 16.45,124.7 | 16.45,124.7 16.45,124.95 | v22,132.1 22,130.25 16.45,124.7
  Bottom 0.3: INA.4 25.03,158.88 25.08,158.93
  Bottom 0.4: 25.08,158.93 25.88,159.72 | 74HC595.16 17.93,136.88 11.1,143.7 11.1,149.8 10.01,150.89 JP4.3 | 74HC595.10 21.12,132.97 v22,132.1
  Bottom 0.5: R14.2 R15.2 30.95,159.7 | 30.95,159.7 30.95,160.65 v31,160.7 | 30.95,159.7 30.93,159.72 25.88,159.72 | v48,113 48,112.5 v45.8,110.3
3V2  (via drill 0.35)
  Top 0.5: LSM6DS3.P$2 29.88,18.32 34.69,13.51 U$10.UCC | v41.7,29.3 41.37,29.63 RADIO.P$25 | JP5.3 11.21,48.89 17.41,42.69 GPS-NEO7M.P$1 20.4,39.7 23.7,36.4 40.9,36.4 42.45,37.95 MP1584-3V3.P$8 | v46,53.6 v46,56
  Bottom 0.5: 46,54.18 41.05,54.18 40.83,53.96 40.83,47.28 42.5,45.61 42.5,42.72 MP1584-3V3.P$7 MP1584-3V3.P$8 | 46,54.18 51.93,54.18 52.25,53.86 53.91,53.86 C8.1 | R47.2 4.1,33.7 1.1,36.7 1.1,39.3 4,42.2 4,46.8 6.09,48.89 JP5.3 | U$10.UCC 41.7,19.63 v41.7,29.3 39.1,29.3 37.7,30.7 37.7,32.1 42.45,36.85 MP1584-3V3.P$8 | MOTOR_BOARD.5 54.65,66.6 56.9,66.6 59.3,64.2 59.3,62.3 56.7,59.7 49.7,59.7 v46,56 | 46,54.18 v46,53.6 | L_3.3.P$1 46.45,47.05 46.45,45.16 47.6,44.01 C9.2 C10.2 42.58,40 MP1584-3V3.P$8
  Bottom 1: R42.2 C8.1
  pour Bottom (rank 2, no thermals): 48.83,47.98 48.83,37.98 40.53,37.98 40.53,54.98 54.53,54.98 54.53,52.98 44.23,52.98 44.23,54.28 41.13,54.28 41.13,48.18 48.63,48.18
3V3  (via drill 0.35)
  Top 0.3: C31.+ 30.8,98 v30,98
  Bottom 0.3: AD1.P8 23.4,86.7 30.3,86.7 31,86 MAX1.P8 | MAX1.P8 32.59,87.19 32.59,93.66 MCP1.P2 29.95,97.95 v30,98 | C29.1 32.7,83.9 MAX1.P8
3V4
  Top 0.3: R62.1 60.12,96.88 X6.P$1 | R63.2 R64.2 C25.2 R62.1 | R62.1 63.55,95.45 ADS1.8 63.55,98.55 64.05,99.05 66.66,99.05 66.86,98.85 68.75,98.85 R61.1
4V
  Top 0.6: JP4.1 8,161.1 16.6,169.7 18.26,170.86 | 18.26,170.86 21.99,173.48 PERE_L.1 | PERE_SP.1 19.42,169.7 18.26,170.86
4V1
  Top 1: X5.3 43.83,70.97 40.04,74.76 34.34,74.76 24.21,72.04 18.65,69.45 8,58.8 JP5.1
5V1  (via drill 0.35)
  Top 0.5: v53.1,120 v43,120 | v52.1,148.7 v42.9,148.7 42.4,148.2 35.2,148.2 v34.7,147.7 | JP4.4 11.85,148.35 14,150.5 BUZZER.P$2
  Bottom 0.5: 53.1,121 53.1,124 | 53.1,124 53.1,146 52.6,146.5 52,146.5 | v53.1,120 53.1,121 | v34.7,147.7 32.63,149.77 32.63,150.5 | 32.63,150.5 BME280.P$4 | BUZZER.P$2 32.63,150.5 | U$20.P$2 53.1,124 | U$19.P$2 43.5,124 43,123.5 43,121 | 43,121 v43,120 | 43,121 R26.1 | R27.1 53.1,121 | R32.1 51.65,149.15 v52.1,148.7 52.1,146.6 52,146.5 | U$21.P$2 52,146.5 | U$22.P$2 43.5,146.5 42.9,147.1 v42.9,148.7 43.75,149.55 R33.1
5V2  (via drill 0.35)
  Top 0.5: VALVE2.2 10.9,56.54 10.9,57.8 14.9,61.8 | COMPRESS.2 21.2,64.9 20.4,65.7 18.8,65.7 14.9,61.8 | VALVE1.2 14.9,61.79 14.9,61.8 | v17,54 20.5,54 v22.3,52.2
  Bottom 0.5: R46.2 5.15,29.35 5.7,29.9 5.7,33.19 1.8,37.09 1.8,38.91 4.7,41.81 4.7,44.7 6.35,46.35 JP5.4 9.65,46.35 11.81,48.51 11.81,54 | C16.2 38.8,43.4 39.2,43.8 39.2,54.5 39.75,55.05 53.75,55.05 60.4,61.7 62,61.7 62.9,60.8 62.9,59.94 LIDAR.3 | JP6.2 26.73,8.67 20.6,14.8 20.6,32 23.35,34.75 23.35,36.62 | 11.81,54 VALVE2.2 | 22.82,49.6 22.82,37.15 23.35,36.62 | 11.81,54 v17,54 | v22.3,52.2 22.5,52 22.5,49.92 22.82,49.6 | C16.2 C17.2 34.98,43.77 33.96,43.77 32.44,42.25 30.55,42.25 U$8.P$1 | C16.2 37.47,43.32 MP1584-5V.P$8 MP1584-5V.P$7 34.88,38.3 31.99,38.3 30.32,36.63 24.42,36.63 24.43,36.62 23.35,36.62 | 22.82,49.6 23.65,49.6 C15.1
  Bottom 1: C15.1 R45.2
  pour Bottom (rank 2, no thermals): 29.62,44.63 39.62,44.63 39.62,36.33 22.62,36.33 22.62,50.33 24.62,50.33 24.62,40.03 23.32,40.03 23.32,36.93 29.42,36.93 29.42,44.43
5V3  (via drill 0.35)
  Top 0.3: v70.25,88.2 68.8,88.2 R59.2 | v70.25,79.8 68.8,79.8 R60.1
  Top 0.5: X8.1 62.45,86.95 62.45,89.44 63.66,90.65 69.2,90.65 70.25,89.6 v70.25,88.2 U$13.P$2 | U$12.P$2 v70.25,79.8
  Bottom 0.5: v70.25,88.2 v70.25,79.8
-3V1  (via drill 0.35)
  Top 0.3: v28,84.2 28.1,84.3 C27.-
  Bottom 0.3: v28,84.2 27.19,85.01 MAX1.P5 22.92,85.6 22,86.52 22,88 19.19,90.81 AD1.P4
AUX_RADIO
  Top 0.3: JP4.7 9.7,140.73 11.7,138.73 22.83,138.73 35.7,151.6 35.7,156.8 38.49,159.59 STM32F411.2
AUX_RADIO1
  Top 0.3: JP5.7 8.07,38.8 10.2,38.8 15.2,33.8 49.8,33.8 51.5,32.1 51.5,30.3 50.2,29 43.5,29 42.64,29.86 RADIO.P$24
BUS+
  Top 1: MP1584-3V3.P$1 MP1584-3V3.P$2 62.05,42.67 63.55,44.16 63.55,52.85 61.75,54.65 50.03,54.65 46.83,57.85 38.57,57.85 MP1584-5V.P$1
  Bottom 0.5: MP1584-3V3.P$2 59.1,42.67 | R40.1 59.1,42.67 | C13.2 56.52,40.52 C12.2 | 59.1,42.67 57.03,42.67 C12.2 | U$6.P$2 56.02,42.66 C12.2 | U$7.P$2 34.92,51.83 C4.2 | C6.2 35.95,51.75 C4.2 | MP1584-5V.P$2 34.93,54.8 | 34.93,54.8 34.93,52.77 C4.2 | R43.1 34.93,54.8
  Bottom 1: POWER.2 34.93,59.37 MP1584-5V.P$2 MP1584-5V.P$1
  pour Bottom (rank 2, no thermals): 62.63,43.78 62.63,38.18 55.33,38.18 55.33,44.48 55.83,44.98 55.83,46.58 56.23,46.58 56.23,43.78
  pour Bottom (rank 2, no thermals): 33.82,58.43 39.42,58.43 39.42,51.13 33.12,51.13 32.62,51.63 31.02,51.63 31.02,52.03 33.82,52.03
BUS+_OUT
  Top 1: POWER.3 45.04,64.56 X5.1
BUZZER
  Bottom 0.3: 74HC595.1 25.12,136.88 19.8,142.2 19.8,147.7 19.4,148.1 R12.1
C1  (via drill 0.35)
  Top 0.3: v19.3,88.3 19.4,88.4 26.1,88.4 C26.-
  Bottom 0.3: R4.2 13.15,90.3 | 13.15,90.3 13.15,90 | 13.15,90 R3.1 | 13.15,90.3 13.2,90.25 15.6,90.25 17.58,88.27 AD1.P2 19.27,88.27 v19.3,88.3 | ME2-O2_OXYGEN_SENSOR1.C 10.5,87.35 13.15,90
CK_SD
  Top 0.3: STM32F411.24 53.71,121.49 52.4,122.8 35.6,122.8 34,121.2 34,117 32,115 29,115 26.5,117.5 26.5,119.78 MICRO_SD.CLK
CMD_SD
  Top 0.3: R17.2 35.87,134.19 STM32F411.12
  Top 0.4: MICRO_SD.CMD R17.2
CS_LIS
  Bottom 0.3: STM32F411.27 57.11,129.11 64.2,136.2 64.2,136.19 JP3.9
CS_LIS1  (via drill 0.5)
  Top 0.3: v54,23.1 38.69,23.1 U$10.CS
  Bottom 0.3: v54,23.1 54,23.8 64.39,34.19 JP1.9
CS_LSM
  Bottom 0.3: STM32F411.26 57.17,126.57 64.25,133.65 JP3.10
CS_LSM1  (via drill 0.5)
  Top 0.3: v39.8,22 54.6,22 55.3,22.7 v55.3,23
  Bottom 0.3: LSM6DS3.P$6 26.18,25 36.8,25 v39.8,22 | v55.3,23 55.3,24.39 62.56,31.65 JP1.10
D0_SD
  Top 0.3: STM32F411.35 57.17,149.43 58.2,148.4 58.2,144.2 57.1,143.1 53.9,143.1 43.7,132.9 35.5,132.9 32.32,129.72 32.32,123.64 R16.2
  Top 0.4: MICRO_SD.DAT0 R16.2
D1  (via drill 0.35)
  Top 0.25: SI2300A.3 52.2,88.77
  Top 0.5: 52.2,88.77 52.2,86.4 v51.6,85.8
  Bottom 0.5: v51.6,85.8 51.6,87.13
  Bottom 0.55: 51.6,87.13 JP9.2
D2
  Bottom 0.3: R6.2 ME2-O2_OXYGEN_SENSOR1.D
FOTO0
  Top 0.3: JP3.14 66.29,123.49 60.5,117.7 54.1,117.7 47.5,111.1 31.5,111.1 30.09,112.52 27.5,112.52 20.02,120 13.01,120 R18.2 11.98,120.78 FOTO0.2
FOTO1  (via drill 0.35)
  Top 0.3: JP3.13 68.53,126.03 70.5,128 70.5,134.4 74.6,138.5 74.6,141.7 70.5,145.8 70.5,157 69,158.5 66.8,158.5 v58.3,167 | v52.9,170.5 U$0.P$1 55.39,169.43 R0.2
  Bottom 0.3: v52.9,170.5 v58.3,167
FOTO2
  Top 0.3: JP2.1 49.27,10 61.11,10 70.17,19.07 70.17,23.05 69.19,24.03 JP1.13
FOTO3
  Top 0.3: JP2.2 47.23,10.5 60.9,10.5 68,17.6 JP1.14
G
  Top 0.25: 48,89.65 R57.2 | 51.45,90.97 R58.1 | JP9.1 47.47,93.68
  Top 0.5: R58.2 R58.1 | R58.2 48,89.65 | SI2300A.1 51.45,90.97 | 47.47,93.68 R58.2
GERMO
  Bottom 0.3: 74HC595.15 17.38,136.22 10.33,143.27 JP4.6
GERMO1  (via drill 0.35)
  Top 0.3: v17.07,49.5 R49.1
  Bottom 0.3: JP5.6 6.53,41.27 5.8,42 5.8,44.2 6.7,45.1 15.8,45.1 17.1,46.4 17.1,49.47 v17.07,49.5
GND  (via drill 0.35)
  Top 0.3: JP10.2 1.14,88.5 1.08,88.56 1.08,91.52 1.76,92.2 2.7,92.2 8.5,98 20.2,98 24.5,93.7 C30.- v28,93.7 C31.- 31.5,91.77 33.8,89.47 33.8,83 | C27.+ 33.07,80.7 33.74,81.38 33.74,82.78 33.8,82.83 33.8,83 | v33.84,82.96 33.8,83
  Bottom 0.3: R6.1 R4.1 16.23,91.4 16.5,91.13 16.5,90.14 17.1,89.54 AD1.P3 19.26,89.54 20.1,88.7 20.1,84.95 | 29.7,83 28.46,81.76 MAX1.P3 | 29.7,83 30.85,83 31.7,82.15 C29.2 33.7,82.15 33.84,82.29 v33.84,82.96 | MCP1.P1 28.05,93.75 v28,93.7 | C1.2 15.85,80.9 16.98,82.03 v16.98,83.03 18.18,83.03 20.1,84.95 | 29.7,83 29.28,83.42 21.63,83.42 20.1,84.95
  pour Top: 0.5,99 38,99 38,79 24.5,79 24.5,85 25.5,86 31,86 32.5,87.5 32.5,90.5 31,92 24.5,92 20.5,96 9.5,96 7,93.5 7,87.5 0.5,87.5
  pour Top: 0.5,87 7.5,87 7.5,93.2 9.8,95.5 20.3,95.5 24.3,91.5 30.7,91.5 32,90.2 32,87.8 30.7,86.5 25.2,86.5 24,85.3 24,79 0.5,79
  pour Bottom: 0.5,99 38,99 38,79 24.5,79 24.5,85 25.5,86 31,86 32.5,87.5 32.5,90.5 31,92 24.5,92 20.5,96 9.5,96 7,93.5 7,87.5 0.5,87.5
  pour Bottom: 0.5,87 7.5,87 7.5,93.2 9.8,95.5 20.3,95.5 24.3,91.5 30.7,91.5 32,90.2 32,87.8 30.7,86.5 25.2,86.5 24,85.3 24,79 0.5,79
GND1  (via drill 0.35)
  Top 0.3: STATE.C 51.24,108.06 v50.9,108.4
  Top 0.5: v18.2,157.5 21.2,154.5 v25.2,154.5 v25.2,160.5 | v48.1,118.3 48.1,114.7 47.8,114.4 44.4,114.4 42.39,116.41 STM32F411.19 | U$0.P$2 57.09,166.21 58.3,165 58.3,160.5 57.39,159.59 STM32F411.39 | v24.6,133.5 20.8,133.5 19.6,132.3 18.13,132.3 15.83,134.6 v15.83,135 | v18.71,143.4 25.81,150.5 28.9,150.5 BME280.P$3 | v48.8,133.9 v48.8,130.9 | v53.1,150.1 53.1,148 52.5,147.4 51.6,147.4 | v47.8,147.4 51.6,147.4 | v51.6,143.9 51.6,147.4 | C2.1 MICRO_SD.VSS 27.7,118.99 v27.7,118.2
  Bottom 0.3: INA.3 25.07,158.22 25.8,157.5 26.43,157.5 INA.7 INA.8 | R28.1 46.15,127.6 48.8,127.6 48.85,127.55 R29.1 | R35.1 47.05,143.05 47.1,143 49.75,143 R34.1 | v50.9,108.4 50.83,108.33 50.83,104.89 44.82,103.55 U$1.3
  Bottom 0.4: 25.2,162 v25.2,160.5 | 25.2,153 v25.2,154.5 | 16.7,157.5 v18.2,157.5 | v24.6,133.5 24.6,132.8 25.07,132.32 74HC595.8 31.18,132.32 34.5,129 34.5,116.41
  Bottom 0.5: NDC7002.2 47.1,143 NDC7002.5 47.1,144.2 47.8,144.9 47.8,146.5 | R22.2 38.25,170.85 37.7,170.3 IRF7905.1 | IRF7905.1 | R24.2 38.78,167.76 IRF7905.3 36.56,167.7 34.7,167.7 | INA.8 27.57,156.93 27.7,156.8 | R11.2 18.71,145.94 SI2302.2 v18.71,143.4 18.71,141.79 24.6,135.9 v24.6,133.5 | IRF7905.1 35.1,170.3 34.7,169.9 34.7,167.7 | BME280.P$3 32.6,154.2 27.7,154.2 | JP4.2 16.53,153.43 16.7,153.6 | STM32F411.19 34.5,116.41 27.69,116.41 | R38.1 v15.83,135 | 27.7,162 34.5,162 36,163.5 36,164.7 34.7,166 34.7,167.7 | v51.6,143.9 51.6,136.7 v48.8,133.9 | v48.8,130.9 NDC7002_.2 48.8,127.6 NDC7002_.5 48.8,126.5 48,125.7 48,124 | STM32F411.39 53.89,159.59 53.1,158.8 v53.1,150.1 | U$1.3 41.57,103.7 29.4,103.7 27.69,105.41 27.69,116.41 | U$20.P$5 48,124 | U$19.P$5 48,124 | v48.1,118.3 48,118.4 48,124 | 47.8,146.5 v47.8,147.4 | U$22.P$5 47.8,146.5 | U$21.P$5 47.8,146.5 | 27.69,116.41 v27.69,118.19 v27.7,118.2 | FOTO0.1 21.3,118.2 23.09,116.41 27.69,116.41
  Bottom 1: 27.7,157.3 27.7,156.8 27.7,154.2 27.7,153 25.2,153 16.7,153 16.7,153.6 | 18.1,162 16.7,162 16.7,157.5 16.7,155.8 | 27.7,160.8 27.7,162 25.2,162 20.3,162
  pour Bottom: 22.2,178 53.7,178 76,155.7 76,124.3 53.7,102 22.2,102 0,124.2 0,155.8
  pour Top: 0,155.8 22.2,178 53.7,178 76,155.7 76,124.3 53.7,102 22.2,102 0,124.2
GND2  (via drill 0.35, 0.7)
  Top 0.5: v49.63,46.08 42.43,46.08 42.43,50.11 MP1584-3V3.P$6 | v31.52,45.43 31.52,38.3 31.47,38.25 MP1584-5V.P$6 MP1584-5V.P$5 24.85,38.33 24.85,50.3 24.84,50.31 | RADIO.P$14 RADIO.P$15 RADIO.P$16 | SI1.2 15.65,51.8 R48.2 19.11,51.6 GPS-NEO7M.P$4 24.84,50.31 | RADIO.P$19 v50.1,31.4 | v39,31.4 RADIO.P$26 | JP6.1 24.19,9.21 20.6,12.8 20.6,18.76 LSM6DS3.P$3 28.84,20.86 33.65,16.05 U$10.GND 36.43,16.9 41.4,16.9 | v1.6,34 1.6,45.6 3.2,47.2 3.2,48.9 5.73,51.43 JP5.2 9.43,51.43 10.1,52.1 10.1,55.6 9.8,55.9 9.8,58.5 20,68.7 29.4,68.7 | RADIO.P$14 v62.7,27.9 | MP1584-3V3.P$5 MP1584-3V3.P$4 | RADIO.P$13 v62.7,16.9 60.2,16.9 | 60.2,16.9 49,16.9 | 49,16.9 41.4,16.9 | RADIO.P$11 60.16,16.86 60.2,16.9 | RADIO.P$8 48.99,16.89 49,16.9 | RADIO.P$2 41.37,16.87 41.4,16.9 | 24.84,50.31 24.84,56.66 MP1584-5V.P$4 | RADIO.P$14 62.7,32.44 53.63,41.51 v53.63,45.08
  Top 1: MP1584-5V.P$4 23.4,58.28 23.4,62.7 29.4,68.7 36.7,68.7 38.3,67.1 44.52,67.1 X5.2 48.22,70.8 50.2,70.8 51.1,69.9 51.1,62.1 51.8,61.4 55.5,61.4 v59,57.9
  Bottom 0.4: U$6.P$1 58.75,46 | U$7.P$1 31.6,54.55
  Bottom 0.5: v50.63,45.08 v49.63,45.08 v49.63,46.08 v50.63,46.08 v51.63,46.08 v52.63,46.08 v53.63,46.08 | v53.63,45.08 v53.63,46.08 | v50.63,45.08 v51.63,45.08 v52.63,45.08 v53.63,45.08 | v61.03,45.78 v61.03,44.78 v62.03,44.78 v62.03,45.78 v62.03,46.78 v61.03,46.78 | v61.03,45.78 v61.03,46.78 | v32.52,46.43 32.66,46.57 34.98,46.57 C17.1 C16.1 | v32.52,46.43 v32.52,45.43 v31.52,45.43 v31.52,46.43 v31.52,47.43 v31.52,48.43 v31.52,49.43 | v32.52,49.43 v31.52,49.43 | v32.52,46.43 v32.52,47.43 v32.52,48.43 v32.52,49.43 | v31.82,56.83 v32.82,56.83 v32.82,57.83 v31.82,57.83 v30.82,57.83 v30.82,56.83 | v31.82,56.83 v30.82,56.83 | v30.82,56.83 30.77,56.78 27.5,56.78 MP1584-5V.P$3 25.79,56.75 | v50.1,31.4 49.1,31.4 | 49.1,31.4 v39,31.4 | 5V.C 2.05,29.25 1.56,29.73 1.56,32.65 | 3V3.C 1.56,32.65 | R44.2 25.79,56.75 | v59,57.9 60.85,59.75 LIDAR.4 | 1.56,32.65 1.56,33.97 v1.6,34 | 49.1,31.4 49.1,37.1 50.4,38.4 C10.1 C9.1 50.63,42.43 v50.63,45.08 | v62.7,27.9 v62.7,16.9 | C6.1 37.25,49.5 C4.1 35.33,49.43 v32.52,49.43 | R41.2 60.95,51.8 | v61.03,46.78 61.03,50.05 MP1584-3V3.P$3 | v61.03,45.78 60.96,45.85 C3.1 58.75,46 | U$6.P$4 53.71,46 v53.63,46.08 | C13.1 53.72,40.5 C12.1 53.72,44.99 v53.63,45.08 | v31.52,49.43 31.52,50.45 U$7.P$4 | 31.6,54.55 C11.1 31.75,56.76 v31.82,56.83 | MP1584-3V3.P$5 MP1584-3V3.P$6 | 25.79,56.75 MP1584-5V.P$4
  Bottom 1: v59,57.9 59,54.62 MP1584-3V3.P$4 60.95,51.8 MP1584-3V3.P$3
  pour Bottom (rank 2, no thermals): 43.63,53.78 41.43,53.78 41.43,48.98 43.63,48.98
  pour Bottom (rank 2, no thermals): 58.13,54.68 58.13,48.48 59.83,48.48 59.83,46.88 56.53,46.88 56.53,44.08 62.63,44.08 62.63,54.68
  pour Bottom (rank 2, no thermals): 49.13,48.08 49.13,38.28 54.83,38.28 54.83,46.58 51.93,46.58 50.43,48.08
  pour Bottom (rank 2, no thermals): 23.82,39.43 23.82,37.23 28.62,37.23 28.62,39.43
  pour Bottom (rank 2, no thermals): 22.92,53.93 29.12,53.93 29.12,55.63 30.72,55.63 30.72,52.33 33.52,52.33 33.52,58.43 22.92,58.43
  pour Bottom (rank 2, no thermals): 29.52,44.93 39.32,44.93 39.32,50.63 31.02,50.63 31.02,47.73 29.52,46.23
  pour Top: 38,76 54,76 76,54 76,22 54,0 22,0 0,22 0,54 22,76
  pour Bottom (rank 3): 22,76 54,76 76,54 76,22 54,0 22,0 0,22 0,54
GND4
  Top 0.25: R56.2 45.83,89.82 | 50.21,87.95 SI2300A.2
  Top 0.5: 45.83,89.82 R57.1 50.21,87.95 | SI2300A.2 50.27,83.93 JP8.3
  pour Top: 43,95.6 43,81.6 53,81.6 53,95.6
  pour Bottom: 43,95.6 53,95.6 53,81.6 43,81.6
GND5  (via drill 0.35)
  Top 0.3: X8.2 60.55,86.84 59.55,85.84 59.55,84.25 59.76,84.05 63.35,84.05 U$11.P$2 U$11.P$5 | C25.1 65.52,97.02 v65.52,97.23 | ADS1.3 63.55,101.14 v64.05,100.64
  Top 0.5: R68.1 65.55,78.06 v65.39,77.9 | v71.75,98 71.75,98.85 U$9.P$2 | v64.78,89.82 65.55,89.05 R66.1 | v61.25,90 60.05,88.8 60.05,88.05 X8.2 | U$13.P$5 70.25,84 | 70.25,84 U$12.P$5 | U$11.P$5 70.25,84
  Bottom 0.3: v65.52,97.23 65.52,99.16 v64.05,100.64 63.64,100.22 X7.P$2 | v71.75,98 70.98,97.23 v65.52,97.23 | v64.78,89.82 64.78,96.49 v65.52,97.23 | v65.39,77.9 65.39,81.79 65.5,81.9
  Bottom 0.5: v64.78,89.82 64.7,89.74 64.7,88.29 63.96,87.55 X8.2 | 65.5,81.9 62.7,81.9 62.7,88.55 v61.25,90
  pour Bottom: 57.75,103 72.75,103 72.75,74.5 57.75,74.5
  pour Top: 57.75,103 72.75,103 72.75,74.5 57.75,74.5
IN
  Top 0.3: R55.1 47.2,86.22 JP8.2
INA_SP+
  Bottom 0.3: R20.1 21.75,160.3 R21.1
  Bottom 0.5: R39.1 19.2,164.08 R21.1
LATCH_SR  (via drill 0.35)
  Top 0.3: STM32F411.23 56.95,118.95 57.9,119.9 57.9,121.9 57,122.8 53.2,122.8 50.7,125.3 33.6,125.3 v33.2,125.7
  Bottom 0.3: STM32F411.23 57.55,118.95 59.1,120.5 59.1,123.8 63.87,128.57 JP3.12 | v33.2,125.7 29.9,125.7 21.32,134.28 74HC595.12
LATCH_SR1
  Top 0.3: JP1.12 69.66,26.57 74.4,31.31 74.4,39.2 71.2,42.4 71.2,55.21 69.87,56.53 69.87,57.71 62.09,65.5 56.8,65.5 55.65,64.35 MOTOR_BOARD.3
M0_RADIO
  Top 0.3: STM32F411.4 38.51,154.51 36.7,152.7 36.7,151.09 23.26,137.65 11.3,137.65 9.3,135.65 JP4.9
M0_RADIO1
  Top 0.3: JP5.9 13.94,33.65 14.79,32.8 47.3,32.8 47.72,32.38 RADIO.P$20
M1_RADIO
  Top 0.3: JP4.8 23.1,138.19 36.2,151.29 36.2,154.8 38.45,157.05 STM32F411.3
M1_RADIO1
  Top 0.3: JP5.8 12.1,36.19 14.99,33.3 49.59,33.3 51,31.9 51,30.5 50.29,29.8 47.1,29.8 46.45,30.45 RADIO.P$21
M3
  Top 0.5: U$12.P$6 69.25,82.4 71.25,82.4 | 71.25,82.4 U$12.P$4 | X9.2 63.13,77.07 65.73,77.07 67.46,78.8 71.19,78.8 72.05,79.66 72.05,81.65 71.3,82.4 71.25,82.4
M4  (via drill 0.35)
  Top 0.5: U$13.P$4 69.25,85.6 71.25,85.6 U$13.P$6 v72.12,84.8 v72.12,83.9
  Bottom 0.5: X9.1 62.7,75 71.55,75 72.12,75.57 v72.12,83.9 v72.12,84.8 72.12,84.83
MISO_SENS
  Bottom 0.3: STM32F411.32 57.01,141.81 64.09,148.89 JP3.4
MISO_SENS1  (via drill 0.35)
  Top 0.3: U$10.SDO 31.23,23.67 23.88,31.02 LSM6DS3.P$7 | v38.6,20 39.23,20.63 57.64,20.63 64.9,27.89 64.9,44.1 67.69,46.89 JP1.4
  Bottom 0.3: v38.6,20 38.6,20.65 U$10.SDO
MK_MOTOR1+
  Bottom 0.3: 74HC595.4 36.12,134.93 39.26,138.06 45.16,138.06 45.75,138.65 R37.1
MK_MOTOR1-
  Bottom 0.3: 74HC595.5 37.17,134.28 38.4,135.5 45.7,135.5 48.5,138.3 48.5,139.55 R36.1
MK_MOTOR2+
  Bottom 0.3: 74HC595.6 37.27,133.62 38,132.9 49.4,132.9 50.15,132.15 R31.1
MK_MOTOR2-
  Bottom 0.3: 74HC595.7 36.23,132.97 38.8,130.4 42.5,130.4 44.4,132.3 47.1,132.3 47.45,131.95 R30.1
MOSI_SENS  (via drill 0.35)
  Top 0.3: STM32F411.33 53.55,144.35 44.7,135.5 23.8,135.5 v23.5,135.2
  Bottom 0.3: STM32F411.33 57.15,144.35 64.22,151.43 JP3.3 | v23.5,135.2 23.12,135.57 74HC595.14
MOSI_SENS1
  Top 0.3: LSM6DS3.P$5 28.06,25.94 32.87,21.13 U$10.SDA 57.43,21.13 64.4,28.1 64.4,46.6 67.23,49.43 JP1.3
MOTOR1+
  Bottom 0.5: MOTOR_SP_V.1 43.41,172.69 46.6,169.5 46.6,147.55 U$22.P$4 46,147.5 45.8,147.3 45.8,145.7 46,145.5 U$22.P$6
MOTOR1-
  Bottom 0.5: MOTOR_SP_V.2 44.64,172.86 47.7,169.8 47.7,149.8 48.85,148.65 U$21.P$6 49.5,147.5 49.7,147.3 49.7,145.7 49.5,145.5 U$21.P$4
MOTOR2+
  Bottom 0.5: MOTOR_SP_G.1 35.36,108.6 42.3,108.6 49.03,115.33 49.03,119.04 48.85,119.22 U$20.P$4 49.5,123 49.7,123.2 49.7,124.8 49.5,125 U$20.P$6
MOTOR2-
  Bottom 0.5: MOTOR_SP_G.2 31.36,106.86 33.9,109.4 41.9,109.4 47.2,114.7 47.2,122.95 U$19.P$6 46.5,123 46.3,123.2 46.3,124.8 46.5,125 U$19.P$4
N$1  (via drill 0.35, 0.5)
  Top 0.3: C26.+ 29.1,87.8 20.1,87.8 v19.3,87
  Bottom 0.3: R5.2 RT2.1 R1.1 v16.1,87.2 16.3,87 AD1.P1 v19.3,87
N$2
  Top 0.3: U$1.1 47.97,106.47 R13.1
N$3
  Bottom 0.3: U$6.P$8 57.15,49.08 R41.1 R42.1 C8.2
  pour Bottom (rank 2, no thermals): 54.93,54.68 57.83,54.68 57.83,48.18 57.13,48.18 56.93,47.98 56.43,47.98 56.43,49.58 56.63,49.78 56.63,50.58 56.33,50.88 54.93,50.88
N$4  (via drill 0.5)
  Bottom 0.3: R3.2 14.85,88.9 R1.2 | R1.2 RT2.2 | R1.2 v11.8,87.2
N$5  (via drill 0.35)
  Top 0.3: C28.+ 26.5,81.4 29.27,81.4 v29.77,81.9
  Bottom 0.3: v29.77,81.9 29.73,81.86 MAX1.P2
N$6
  Bottom 0.3: U$7.P$7 29.65,51.83 30.05,52.23 C11.2
N$7  (via drill 0.35)
  Top 0.3: v38.02,53.33 28.72,53.33 v27.42,52.03
  Bottom 0.3: v38.02,53.33 37.75,53.6 R43.2 | U$7.P$6 28.27,51.17 v27.42,52.03
N$8
  Bottom 0.3: U$7.P$8 28.52,52.95 R44.1 R45.1 C15.2
  pour Bottom (rank 2, no thermals): 22.92,50.73 22.92,53.63 29.42,53.63 29.42,52.93 29.62,52.73 29.62,52.23 28.02,52.23 27.82,52.43 27.02,52.43 26.72,52.13 26.72,50.73
N$9
  Bottom 0.3: U$6.P$7 56.02,47.95 56.43,47.55 C3.2
N$10  (via drill 0.35)
  Top 0.3: v57.53,39.58 57.53,48.88 v56.23,50.18
  Bottom 0.3: v57.53,39.58 57.8,39.85 R40.2 | U$6.P$6 55.38,49.33 v56.23,50.18
N$11
  Bottom 0.3: U$6.P$5 53.5,48.6 52.45,49.65 C7.2
  pour Bottom (rank 2, no thermals): 51.73,51.58 51.73,49.38 53.23,47.88 55.03,47.88 55.03,49.28 54.13,50.18 53.13,50.18 53.03,50.28 53.03,51.48 52.93,51.58
N$12
  pour Bottom (rank 2, no thermals): 44.33,52.58 44.33,48.48 50.63,48.48 52.23,46.88 55.13,46.88 55.13,45.38 55.53,45.38 55.53,47.58 53.03,47.58 51.33,49.28 51.33,52.58
N$13
  Bottom 0.5: BUZZER.P$1 SI2302.3
N$14
  Bottom 0.3: R12.2 R11.1 16.81,145.86 SI2302.1
N$15
  Bottom 0.3: R20.2 22.3,159.15 C5.2 22.88,157.57 INA.2
N$16
  Bottom 0.3: U$7.P$5 29,49.2 27.95,48.15 C14.2
  pour Bottom (rank 2, no thermals): 26.02,47.53 28.22,47.53 29.72,49.03 29.72,50.83 28.32,50.83 27.42,49.93 27.42,48.93 27.32,48.83 26.12,48.83 26.02,48.73
N$17
  pour Bottom (rank 2, no thermals): 25.02,40.13 29.12,40.13 29.12,46.63 30.72,48.03 30.72,50.93 32.22,50.93 32.22,51.33 30.02,51.33 30.02,48.83 28.32,47.13 25.02,47.13
N$18
  Bottom 0.3: R19.2 22.3,155.85 C5.1 22.77,156.93 INA.1
N$19
  Bottom 0.3: 5V.A 2.6,27.65 R46.1
N$20
  Bottom 0.5: IRF7905.7 IRF7905.8 30.17,174.09 PERE_L.2
N$21
  Bottom 0.5: IRF7905.5 IRF7905.6 24.74,167.76 PERE_SP.2
N$22
  Bottom 0.3: IRF7905.2 38.69,169.03 R22.1 R23.2
N$23
  Bottom 0.3: IRF7905.4 38.35,166.5 R24.1 R25.2
N$24
  Bottom 0.3: NDC7002.6 48.38,144.03 49.73,144.03 50.4,144.7 50.4,145.5 | R32.2 50.4,150.15 50.4,147.5 | U$21.P$1 50.4,147.5 | 50.4,145.5 50.4,147.5 | U$21.P$3 50.4,145.5
N$25
  Bottom 0.3: NDC7002_.6 47.52,126.57 47.07,126.57 45.7,125.2 45.7,125 | R26.2 45.7,121.05 45.7,123 | 45.7,125 45.7,123 | U$19.P$1 45.7,123 | U$19.P$3 45.7,125
N$26
  Bottom 0.3: R27.2 50.3,121.05 50.3,123 | 50.3,125 50.3,123 | U$20.P$3 50.3,123 | 50.3,125 50.3,126.35 NDC7002_.4 | U$20.P$1 50.3,125
N$27
  Bottom 0.3: R33.2 45.2,150.35 45.2,147.5 | U$22.P$3 45.2,147.5 | NDC7002.4 45.2,144.65 45.2,145.5 | 45.2,145.5 45.2,147.5 | U$22.P$1 45.2,145.5
N$28
  Bottom 0.3: R36.2 49.8,139.95 49.8,141.1 | 49.8,141.1 R34.2 | NDC7002.1 49.8,141.1
N$29
  Bottom 0.3: R37.2 44.4,139.95 44.4,141.2 | 44.4,141.2 R35.2 | NDC7002.3 44.5,141.1 44.4,141.2
N$30
  Bottom 0.3: 3V3.A 4,31.15 R47.1
N$31
  Top 0.3: SI1.1 R48.1 R49.2
N$32
  Bottom 0.3: R30.2 46.1,130.75 46.1,129.5 | 46.1,129.5 R28.2 | NDC7002_.1 46.1,129.5
N$33
  Top 0.5: SI1.3 13.95,55.95 | 13.95,55.95 13.25,56.65 VALVE2.1 | COMPRESS.1 22.7,64.9 22.7,63.9 21.1,62.3 20.3,62.3 18.2,60.2 | 18.2,60.2 13.95,55.95 | VALVE1.1 18.2,60.26 18.2,60.2
N$35
  Bottom 0.3: R31.2 51.5,130.65 51.5,129.5 | 51.5,129.5 R29.2 | NDC7002_.3 51.5,129.5
N$39
  Top 0.3: R61.2 72.1,101.7 72.05,101.75 U$9.P$1 68.84,101.75 68.44,102.15 66.6,102.15 64.35,99.91 63.75,99.91 63.05,100.61 ADS1.4
N$40
  Top 0.3: R65.1 R66.2
  Top 0.5: R65.1 63.45,85.05 U$11.P$1
N$41
  Top 0.3: R68.2 R67.2 63.4,80.8 U$11.P$3
N$42  (via drill 0.35)
  Top 0.3: v28,82.49 28,83.1 26.8,84.3 C28.-
  Bottom 0.3: MAX1.P4 27.19,81.68 v28,82.49
OE_SR  (via drill 0.35)
  Top 0.3: STM32F411.25 52.68,124.03 50.91,125.8 44.6,125.8 42.5,127.9 34.2,127.9 v33.2,126.9
  Bottom 0.3: R38.2 18.73,134.93 74HC595.13 21.48,134.93 29.5,126.9 v33.2,126.9 | STM32F411.25 57.13,124.03 64.21,131.11 JP3.11
OE_SR1  (via drill 0.35)
  Top 0.3: MOTOR_BOARD.2 57.86,64.6 61.7,64.6 v67.1,59.2
  Bottom 0.3: JP1.11 69.81,29.11 74.4,33.7 74.4,39.2 72.65,40.95 72.65,52.07 69.92,54.8 69.92,57.64 68.36,59.2 v67.1,59.2
OUT
  Top 0.25: R55.2 44.04,87.68
  Top 0.3: R56.1 44.04,87.68 | R55.2 44.06,84 JP8.1
PERE1
  Bottom 0.3: R23.1 41.85,170.85 42.7,170 42.7,164.89 41.91,164.1 39,164.1 36.4,161.5 36.4,140.69 31.28,135.57 74HC595.3
PERE2
  Bottom 0.3: R25.1 41.75,167.75 42,167.5 42,165.3 41.5,164.8 38.7,164.8 35.7,161.8 35.7,141 30.93,136.22 74HC595.2
PHOTO1
  Top 0.3: R62.2 62.55,96.28 60.71,98.12 60.71,101.47 X7.P$1 60.7,101.47 61.27,102.04 ADS1.5
RX_GPS
  Top 0.3: JP4.11 9.8,130.57 10.79,131.56 10.79,135.19 12.21,136.6 23.73,136.6 28.94,141.81 STM32F411.9
RX_GPS1
  Bottom 0.3: JP5.10 11.31,31.11 16.3,36.1 16.3,43.6 20.4,47.7 GPS-NEO7M.P$3
RX_LIDAR
  Bottom 0.3: STM32F411.29 57.09,134.19 64.18,141.28 64.19,141.27 JP3.7
RX_LIDAR1
  Top 0.3: LIDAR.2 63.02,58.3 64.2,58.3 66.7,55.8 69.8,55.8 70.7,54.9 70.7,39.73 70,39.03 70,37.17 70,37 69.73,36.73 JP1.8
RX_RADIO
  Bottom 0.3: STM32F411.31 57.07,139.27 64.15,146.35 JP3.5
RX_RADIO1  (via drill 0.35)
  Top 0.3: v44.6,19.7 44.6,19.4 45.1,18.9 46.3,18.9 47.03,19.63 58.05,19.63 65.9,27.48 65.9,39.7 JP1.6 | v43.9,29.8 RADIO.P$23
  Bottom 0.3: v43.9,29.8 44.6,29.1 v44.6,19.7
SCK_SENS  (via drill 0.35)
  Top 0.3: JP4.12 9.73,128.03 11.35,129.65 11.35,135.04 12.34,136.03 18.5,136.03 | STM32F411.11 38.2,136.73 37.5,136.03 18.5,136.03 | v18.5,133.6 18.5,136.03
  Bottom 0.3: 74HC595.11 18.52,133.62 v18.5,133.6
SCK_SENS1  (via drill 0.35)
  Top 0.3: U$10.SCL 34.51,18.59 29.7,23.4 LSM6DS3.P$4 12.4,23.4 9.77,26.03 JP5.12 | v52.6,62.9 52.69,62.9 MOTOR_BOARD.4
  Bottom 0.3: JP5.12 9.63,26.03 17.4,33.8 17.4,37.1 21.8,41.5 21.8,51.1 18.4,54.5 18.4,58.26 27.13,67 40.9,67 43.09,64.8 50.7,64.8 v52.6,62.9
SCL1  (via drill 0.35)
  Top 0.3: v30.01,157.51 31.89,157.51 BME280.P$2 34.47,156.77 38.6,160.9 44.3,160.9 53.23,151.97 STM32F411.36
  Bottom 0.3: INA.5 28.98,158.88 R15.1 29.25,158.27 v30.01,157.51 | STM32F411.36 60.37,151.97 62.37,153.97 JP3.2
SCL2
  Bottom 0.3: JP6.4 31.81,10.31 32.4,10.9 40.31,10.9 63.4,33.99 63.4,47.5 67.87,51.97 JP1.2
SCL3
  Top 0.3: ADS1.9 64.05,98.34 64.25,98.55 66.45,98.55 R63.1 69.2,95.8 69.75,95.8 70.25,95.3 70.25,93.6 69.7,93.05 61.7,93.05 60.37,94.38 X6.P$3
SDA1
  Top 0.3: BME280.P$1 34.81,159.31 39,163.5 43.9,163.5 52.9,154.5 STM32F411.37
  Bottom 0.3: INA.6 27.98,158.22 29.25,156.95 R14.1 30.15,155.5 33.1,155.5 33.8,156.2 33.8,158.14 BME280.P$1 | STM32F411.37 60.01,154.51 62.01,156.51 JP3.1
SDA2
  Bottom 0.3: JP6.3 29.27,9.47 31.2,11.4 40.1,11.4 62.9,34.2 62.9,49.41 JP1.1
SDA3
  Top 0.3: ADS1.10 64.55,97.96 66.14,97.96 66.75,97.35 R64.1 67.6,95.3 69.55,95.3 69.75,95.09 69.75,93.81 69.5,93.55 61.91,93.55 59.83,95.62 X6.P$2
SHIFT
  Bottom 0.3: 74HC595.9 16.77,132.32 15.1,134 15.1,137.79 10.89,142 6.4,142 5.6,142.8 5.6,145 6.41,145.81 JP4.5
SHIFT1
  Bottom 0.3: JP5.5 15.71,43.81 17.9,46 17.9,58.5 26.9,67.5 41.1,67.5 43.3,65.3 51.5,65.3 55.2,61.6 56.7,61.6 57.72,62.62 MOTOR_BOARD.1
SOUT1
  Bottom 0.3: C1.1 R5.1 13.12,82.97 5.99,82.97 JP10.1
SP+
  Bottom 0.3: R19.1 19.4,154.5 R21.2
  Bottom 0.5: R21.2 14.5,154.7 11.3,157.9 7,157.9 5.75,156.65 5.75,154.35 4.8,153.4 4.8,144.9 1.8,141.9 1.8,138.2 3.1,136.9 3.1,131.6 5.25,129.45 5.25,127.25 6.5,126 8,126 9,125 9,123.94 8.29,123.23 SP.1
SP-
  Bottom 0.5: R39.2 28.4,164.1 27,165.5 17.5,165.5 10.9,158.9 6.61,158.9 4.85,157.14 4.85,154.95 3.8,153.9 3.8,145.39 0.8,142.39 0.8,137.7 2.1,136.4 2.1,131.1 4.35,128.85 4.35,126.15 6.17,124.33 SP.2
SWITCH
  Top 0.3: STM32F411.21 55.5,109.6 51.77,105.87 STATE.A 50.44,104.75 46.9,103.8 45.6,105.1 U$1.2
TX_GPS
  Top 0.3: JP4.10 9.8,133.11 10.29,133.6 10.29,135.4 12,137.1 23.42,137.1 28.67,142.35 36.8,142.35 38.8,144.35 STM32F411.8
TX_GPS1
  Bottom 0.3: JP5.11 9.67,28.57 16.9,35.8 16.9,43.3 18.83,45.23 GPS-NEO7M.P$2
TX_LIDAR
  Bottom 0.3: STM32F411.28 57.15,131.65 64.23,138.73 JP3.8
TX_LIDAR1
  Top 0.3: LIDAR.1 63.36,56.14 66.2,53.3 69.2,53.3 70.2,52.3 70.2,40.2 69.27,39.27 JP1.7
TX_RADIO
  Bottom 0.3: STM32F411.30 57.03,136.73 64.11,143.81 64.1,143.81 JP3.6
TX_RADIO1  (via drill 0.35)
  Top 0.3: v45.7,19.7 46.13,20.13 57.84,20.13 65.4,27.69 65.4,41.8 67.95,44.35 JP1.5 | v45.2,29.8 45.2,31.38 RADIO.P$22
  Bottom 0.3: v45.2,29.8 45.2,21 45.7,20.5 v45.7,19.7
UM1_MOSFET1
  Top 0.3: U$13.P$3 69.25,86.4 | U$13.P$1 71.25,86.4 69.25,86.4 | 69.25,86.4 68.7,86.4 R59.1 67.3,85 U$11.P$6
UM2_MOSFET1  (via drill 0.35)
  Top 0.3: v64.65,82.9 64.75,83 U$11.P$4 67.3,83 R60.2 68.7,81.6 69.25,81.6 | U$12.P$1 69.25,81.6 | U$12.P$3 71.25,81.6 69.25,81.6
UM3  (via drill 0.35)
  Top 0.3: v61.75,80.5 63.2,79.05 R67.1
  Bottom 0.3: v61.75,80.5 59.55,82.7 59.55,89.75 58.19,91.11 58.19,92.46 58.86,93.12 X6.P$4
UM4  (via drill 0.35)
  Top 0.3: v63.77,89.52 63.45,89.2 R65.2
  Bottom 0.3: v63.77,89.52 63.02,89.52 60.66,91.88 X6.P$5

## Text on the board
tNames: SDA | 4V | GND | SCl | MOSI_S | 3V3 | 5V | MISO_S | RX_R | SHIFT | GERMO | TX_R | AUX_R | RX_L | TX_L | M1_R | CS_LIS | M0_R | TX_GPS | CS_LSM | OE_SR | RX_GPS | LATCH | SCK_S | FOTO1 | FOTO0 | FDC6 / 420C | 4V | SDA | GND | MOSI / _S | 3V3 | SCL | 5V | MISO_S | SHIFT | TX_R | GERMO | RX_R | AUX_R | TX_L | M1_R | RX_L | M0_R | CS_LIS | RX_G | CS_LSM | TX_G | OE_SR | SCK_S | LATCH | FOT1 | FOT / 0 | GND | 5V | SDA | SCL | FOTO0 | FOTO1
bNames: PHO | GND | 3V3 | SDA | SCL | UM1 | 3V3 / 5V5 | UM2 | GND | GND | SOUT | 5V | M2 | M1
tValues: D | G | OUT | IN | GND